# Altium PCB RelayDetect.PcbDoc (part 1 of 2)
Units mm, origin at the board's own origin, x right, y up, seen from the top; angles counter-clockwise.
Board outline 83 x 53 mm, 4 copper layers (Top Layer, Signal, GND, Bottom Layer), stack 0.603 mm thick; 164 components, 110 nets, 604 pads, 228 vias.
Unrouted connection lines stored in the file: 62.
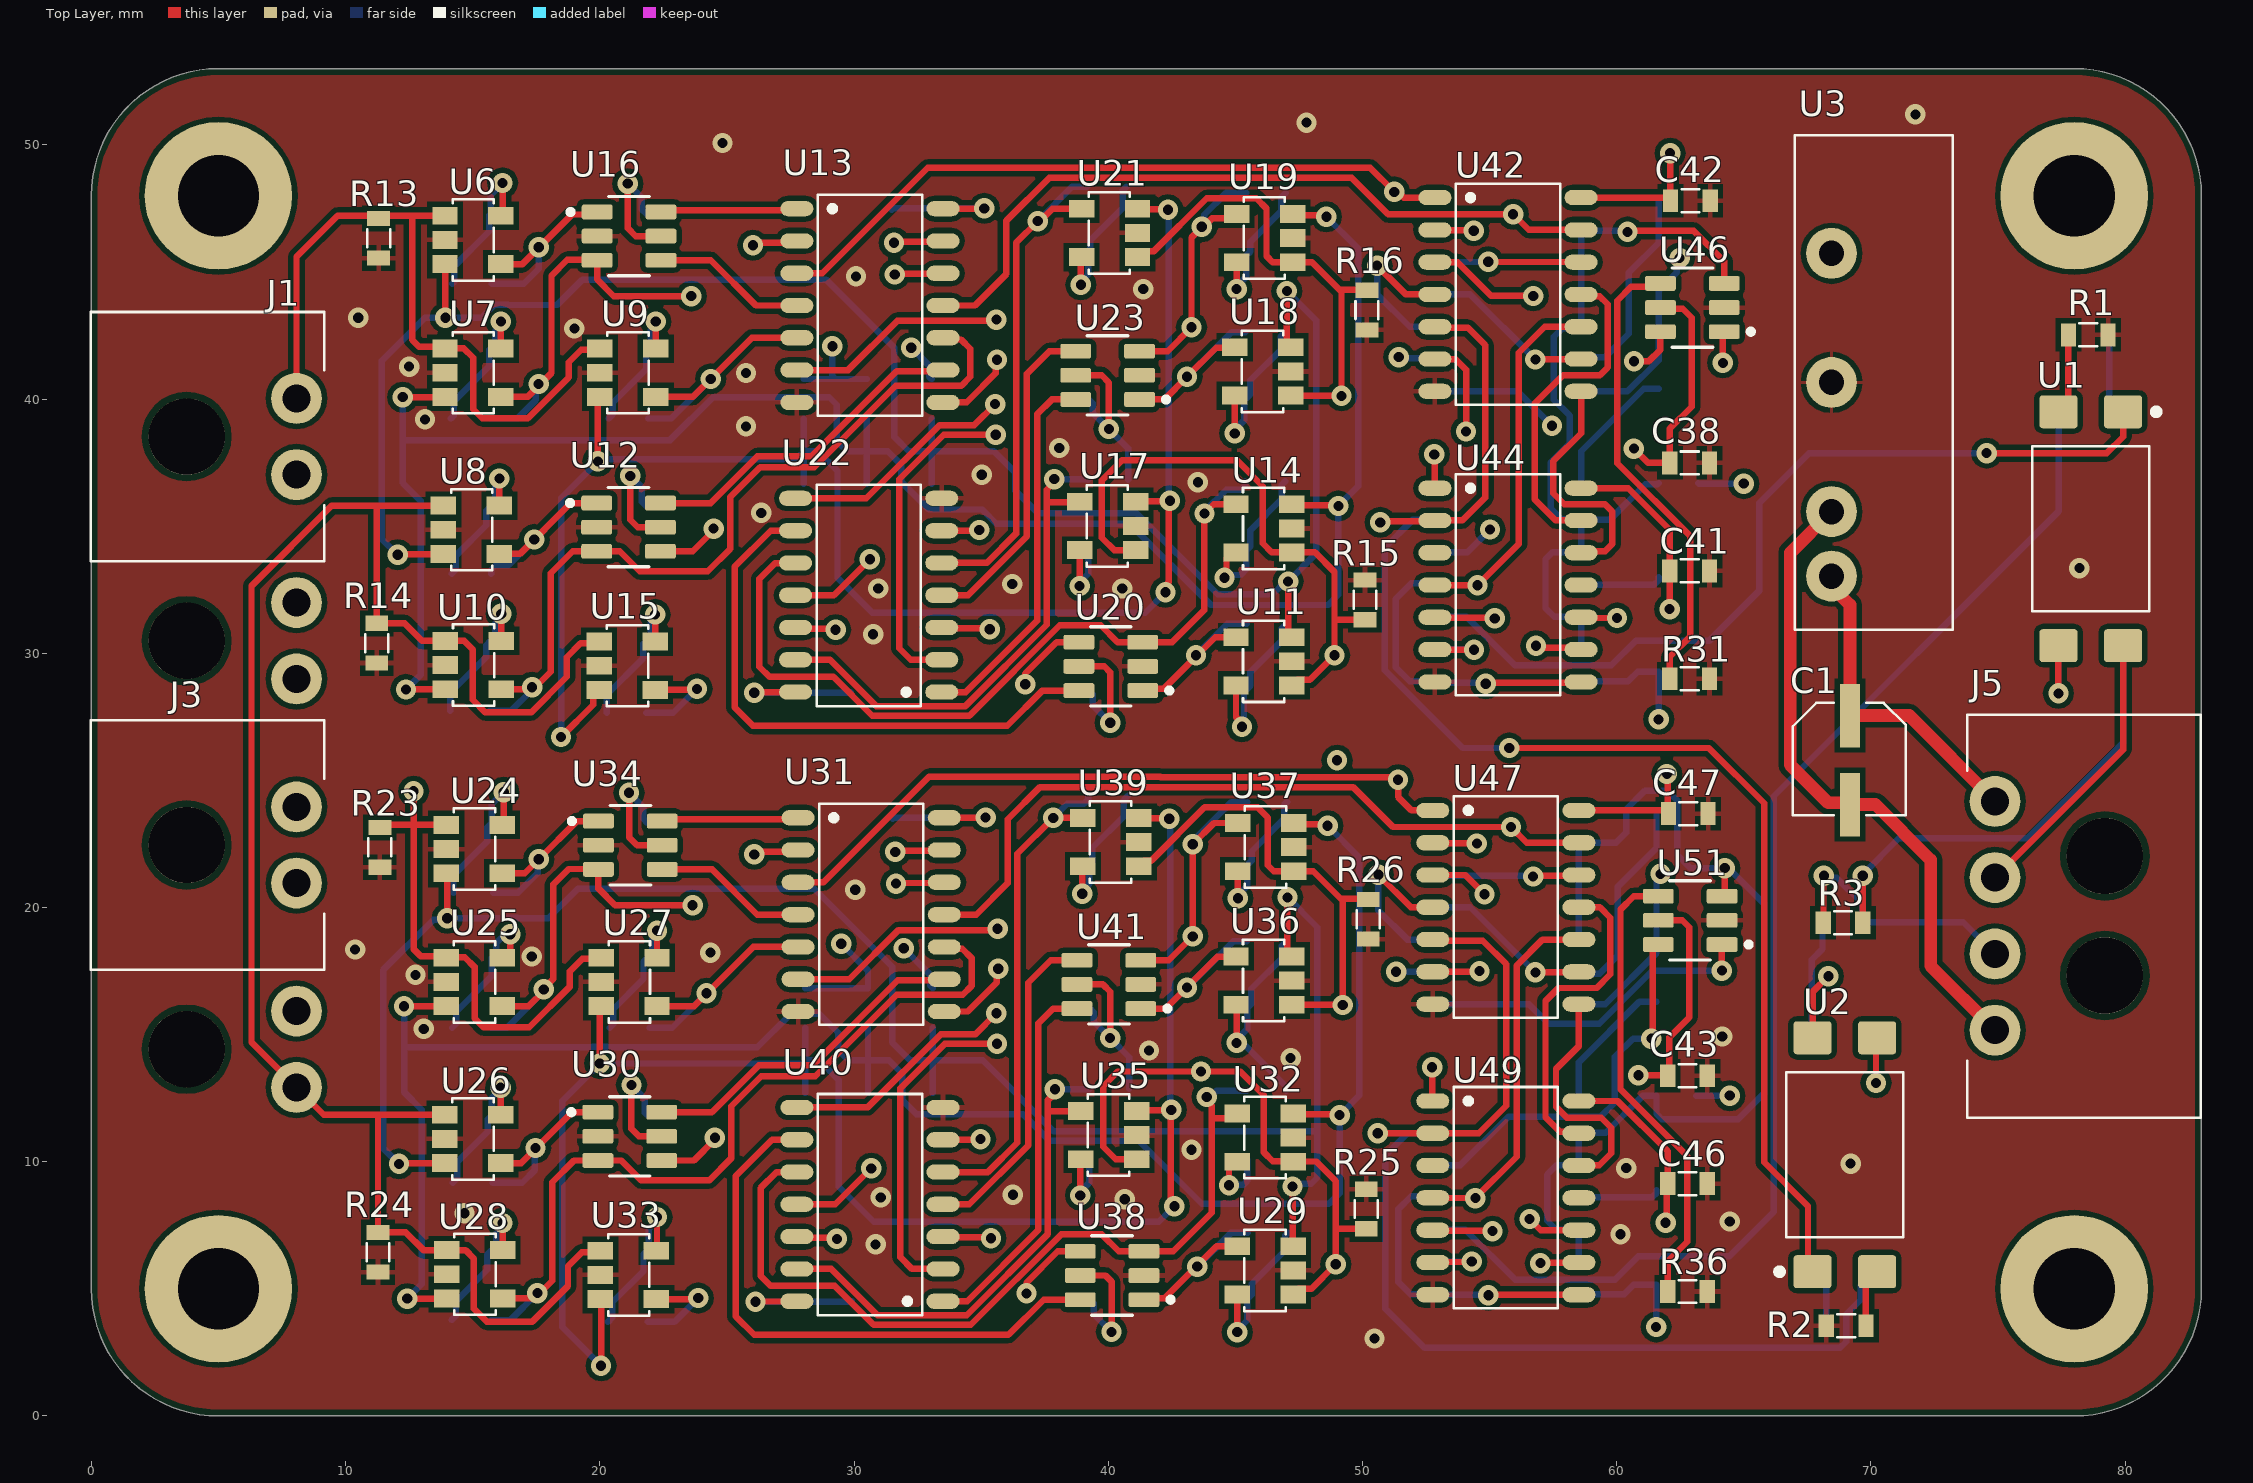
[diagram p0: Top Layer view]
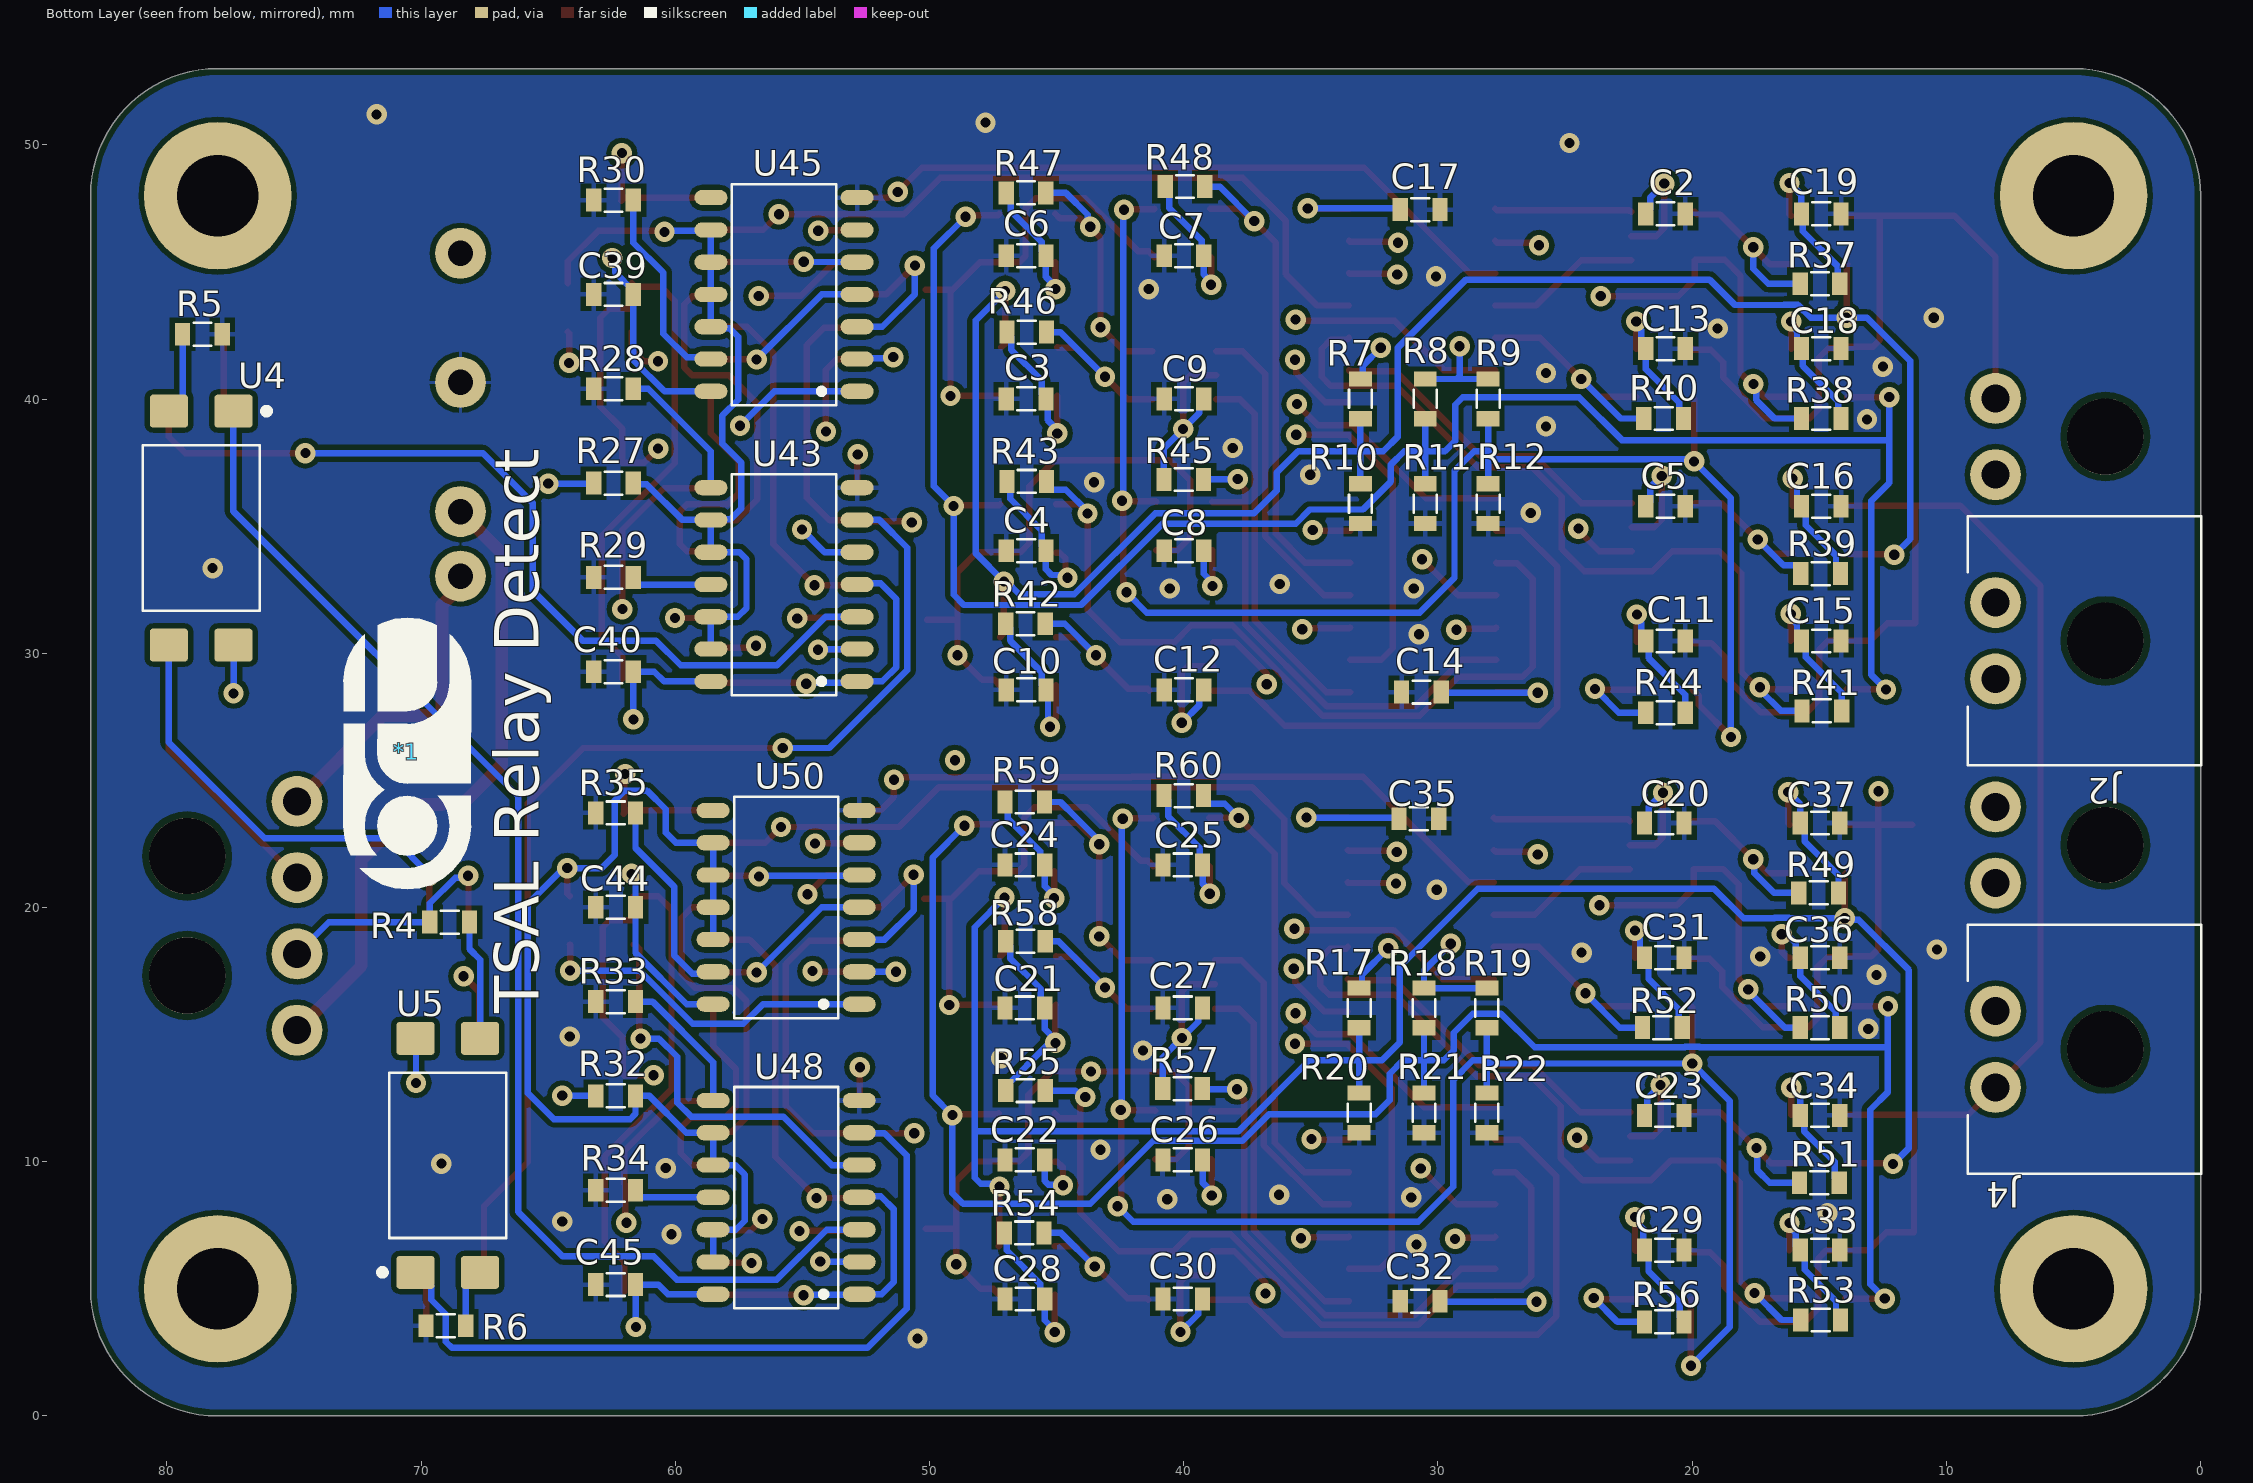
[diagram p1: Bottom Layer view, seen from below]
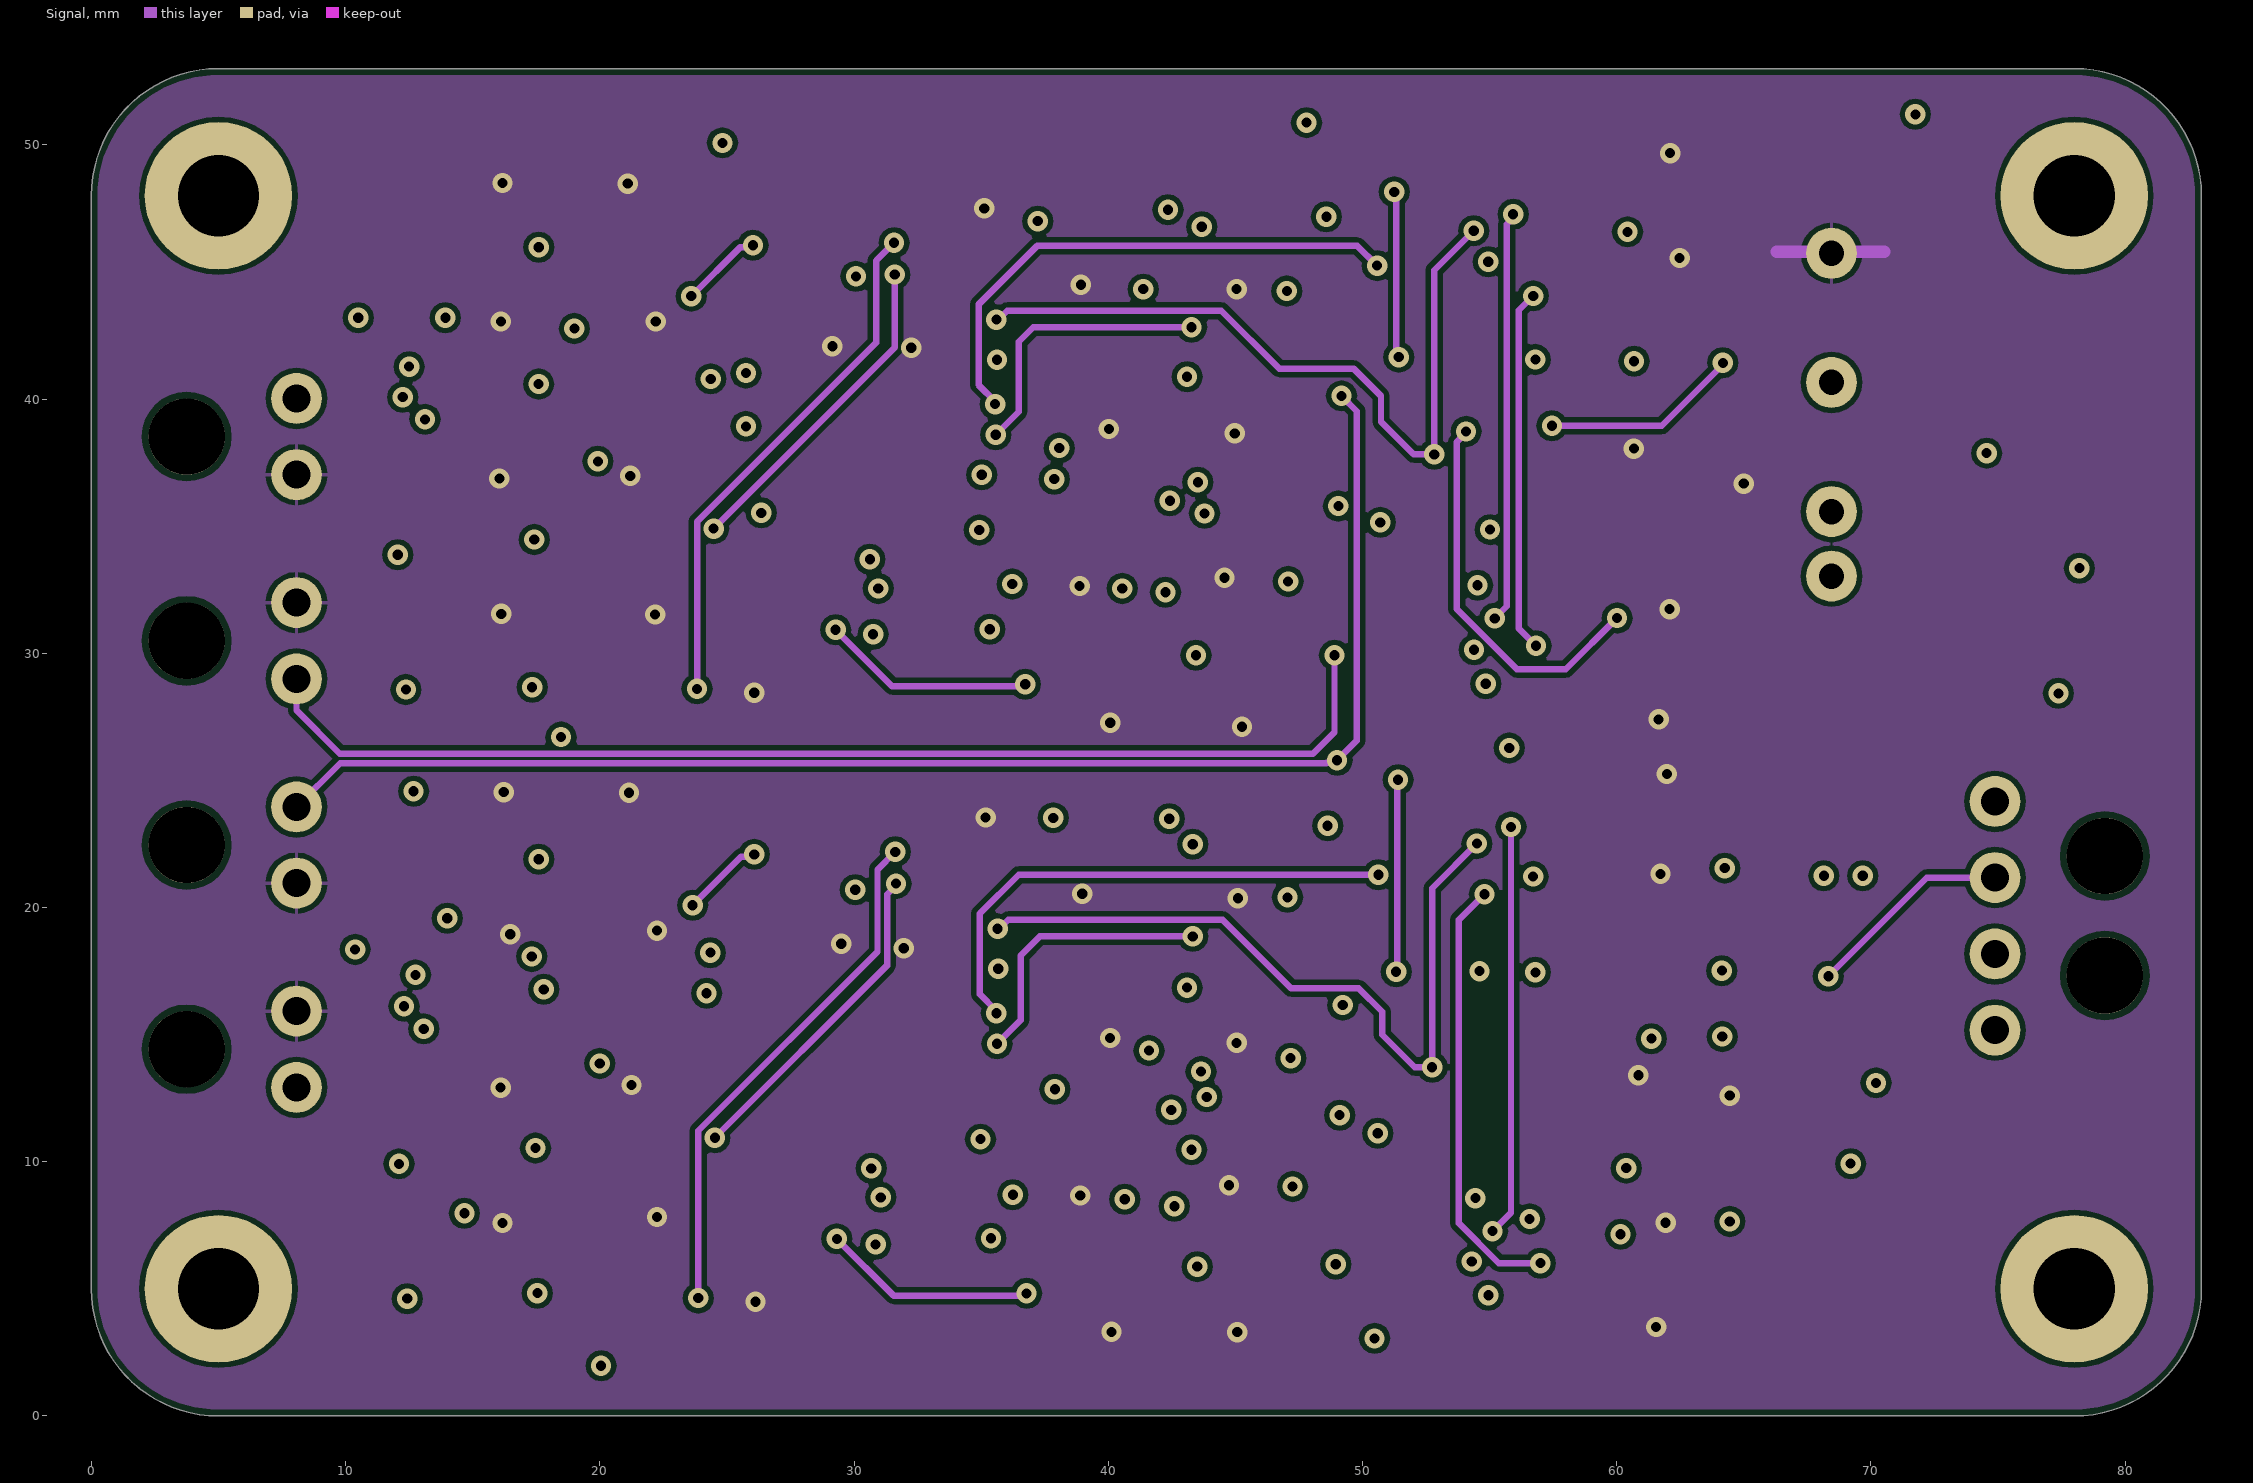
[diagram p2: Signal]
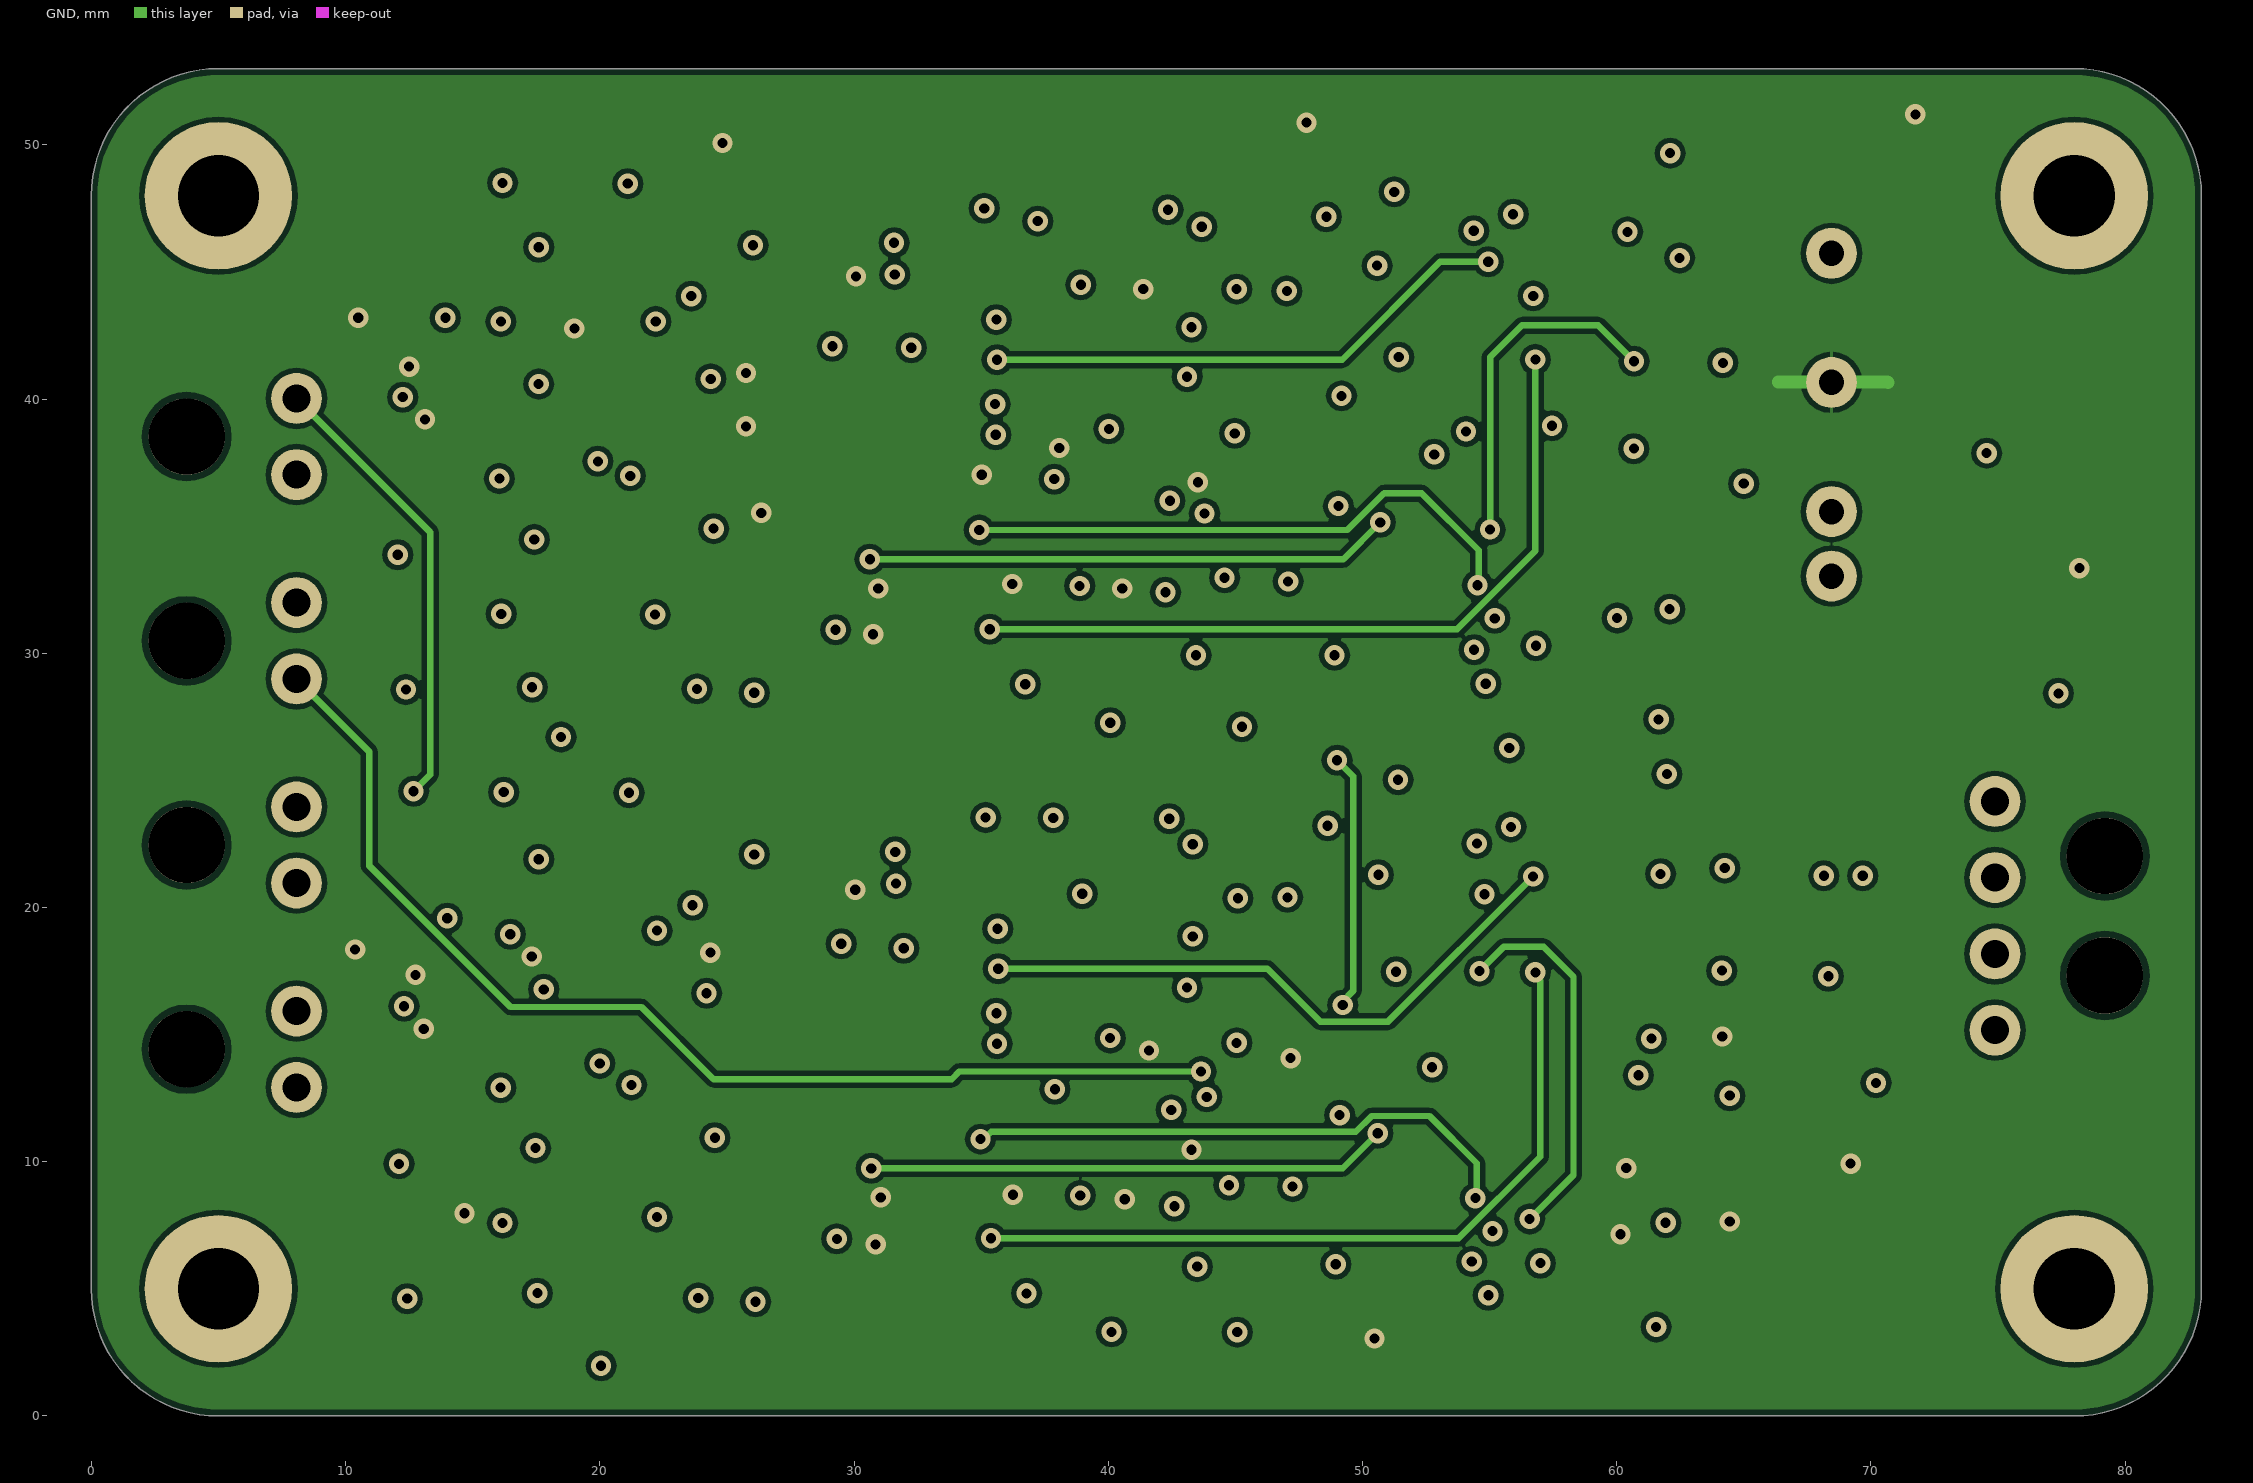
[diagram p3: GND]
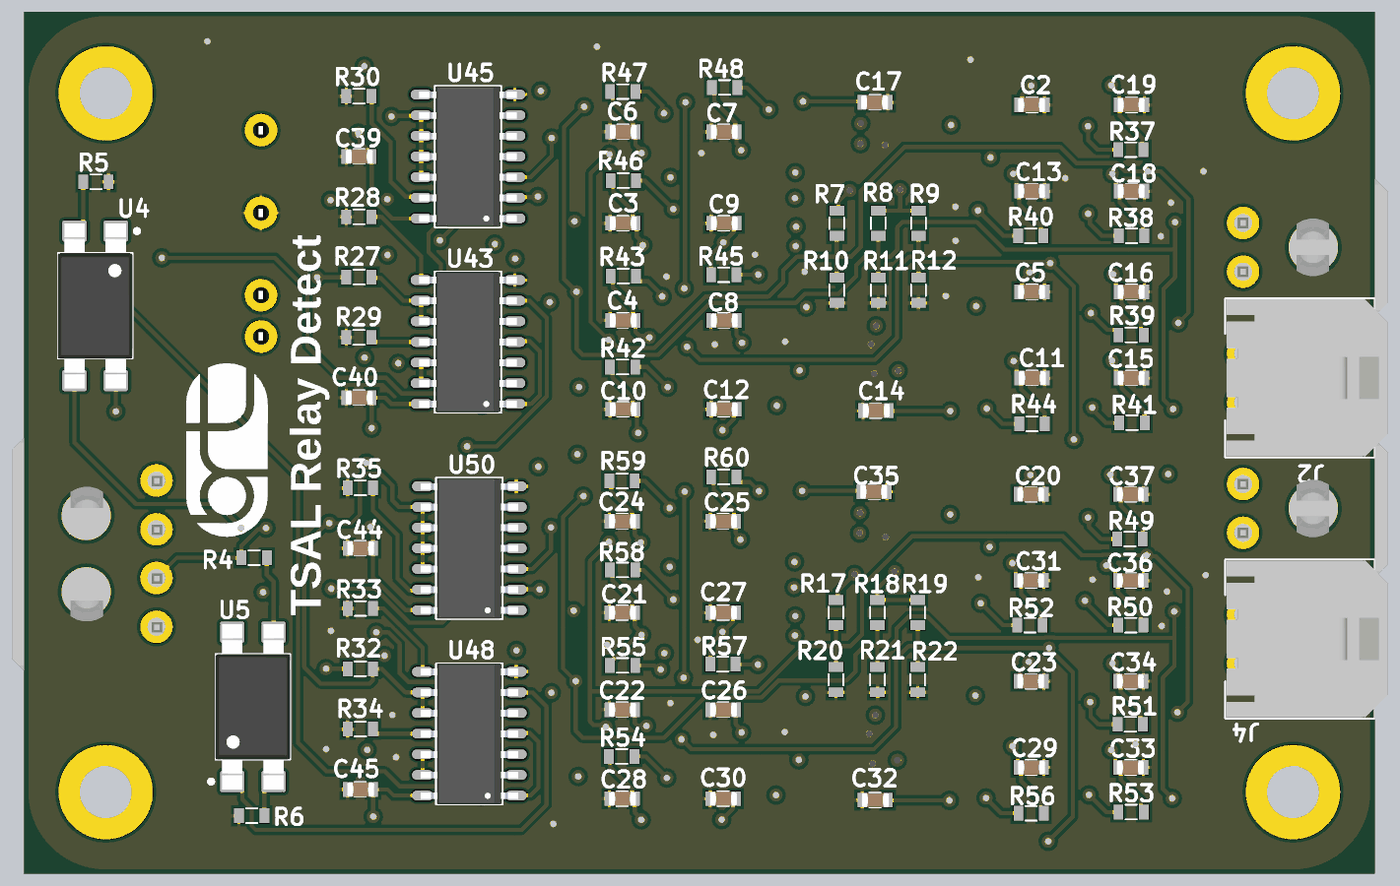
[diagram p5: 3D render of the assembled board from below, using the file's embedded part models]

## Layer stack, top to bottom
Top Solder: solder mask 0.0102, Solder Resist, Dk 3.5
Top Layer: signal copper 0.0356
Dielectric 2: prepreg 0.0711, PP-006, Dk 4.1
Signal: signal copper 0.035
Dielectric 1: dielectric 0.32, FR-4, Dk 4.8
GND: signal copper 0.035
Dielectric 3: prepreg 0.0711, PP-006, Dk 4.1
Bottom Layer: signal copper 0.0356
Bottom Solder: solder mask 0.0102, Solder Resist, Dk 3.5

## Board outline
5,0 cw(c5,5) 0,5 0,48 cw(c5,48) 5,53 78,53 cw(c78,48) 83,48 83,5 cw(c78,5) 78,0

## Design rules (kind name [scope] priority, off if disabled: settings)
AcuteAngle [All] p1: minimum=3.50000000000000E+0001 checktracksonly=FALSE
BoardOutlineClearance "BoardOutlineClearance 1" [All] p1: gap=0.25 ignorepadtopadclearanceinfootprint=FALSE except(0: Arc-SplitContinuation Track-SplitContinuation SMDPad-SplitContinuation THPad-SplitContinuation Via-SplitContinuation Fill-SplitContinuation Poly-SplitContinuation Region-SplitContinuation Text-SplitContinuation) // Milling
Clearance "Clearance-1 1/2 Oz" [All] p1: gap=0.125 ignorepadtopadclearanceinfootprint=FALSE except(0.2: Arc-Fill Arc-Poly Track-Fill Track-Poly SMDPad-SMDPad SMDPad-Fill SMDPad-Poly THPad-Fill THPad-Poly Via-Fill Via-Poly Fill-Fill Fill-Poly Poly-Poly Poly-Region Poly-Text; 0.25: Arc-Hole Track-Hole SMDPad-Hole THPad-Hole Via-Hole Fill-Hole Poly-Hole Region-Hole Text-Hole) // Standart
ComponentClearance [All] p1: gap=0.1 collisioncheckmode=3 verticalgap=0.1 showdistances=FALSE
DiffPairsRouting "DiffPairsRouting 1/2 Oz" [All] p1: maxlimit=0.254 minlimit=0.125 mostfreqgap=0.254 toplayer_minwidth=0.125 toplayer_maxwidth=0.381 toplayer_prefwidth=0.381 midlayer1_minwidth=0.125 midlayer1_maxwidth=0.381 midlayer1_prefwidth=0.381 midlayer2_minwidth=0.125 midlayer2_maxwidth=0.381 midlayer2_prefwidth=0.381 bottomlayer_minwidth=0.125 bottomlayer_maxwidth=0.381 bottomlayer_prefwidth=0.381 maxuncoupledlength=12.7
HoleSize "Minimum HoleSize" [IsPad] p1: absolutevalues=TRUE maxlimit=5.9 minlimit=0.6 maxpercent=80.000 minpercent=20.000
HoleSize "Minimum HoleSize VIA 1" [IsVia] p2: absolutevalues=TRUE maxlimit=5.9 minlimit=0.3 maxpercent=80.000 minpercent=20.000 // Standart
HoleToHoleClearance Hole2HoleClearance [All] p1: gap=0.25 allowstackedmicrovias=FALSE
MinimumAnnularRing "Minimum AR VIA Standart" [All] p1: minimumring=0.15
MinimumAnnularRing "Minimum AR PAD Standart" [All] p2: minimumring=0.2
MinimumSolderMaskSliver "SolderMask Bridge Standart" [All] p1: minsoldermaskwidth=0.15 // All Masks
PlaneClearance "PlaneClearance-1 1/2 Oz" [All] p1: clearance=0.2 // Standart
PlaneConnect "TermalConnect-1 1/2 Oz" [All] p1: planeconnectstyle=Relief reliefexpansion=0.2 reliefentries=4 reliefconductorwidth=0.2 reliefairgap=0.2 // Standart
PolygonConnect "PolygonConnect-1 1/2 Oz" [All] p1: thpad.connectstyle=Relief thpad.reliefconductorwidth=0.15 thpad.reliefentries=4 thpad.polygonreliefangle="90 Angle" thpad.airgapwidth=0.2 smdpad.connectstyle=Relief smdpad.reliefconductorwidth=0.2 smdpad.reliefentries=4 smdpad.polygonreliefangle="90 Angle" smdpad.airgapwidth=0.2 via.connectstyle=Direct via.reliefconductorwidth=0.254 via.reliefentries=4 via.polygonreliefangle="90 Angle" via.airgapwidth=0.254 // Standart
RoomDefinition Detection1 [InComponentClass('Detection1')] p1: confinementstyle=ConfineIn formatcopy=TRUE lockcomponents=FALSE outline 9.625,26.585 51.65,26.585 51.65,50.61 9.625,50.61
RoomDefinition Primary [InComponentClass('Primary')] p2: confinementstyle=ConfineIn formatcopy=TRUE lockcomponents=FALSE outline 51.85,26.955 65.765,26.955 65.765,50.355 51.85,50.355
RoomDefinition Detection2 [InComponentClass('Detection2')] p3: confinementstyle=ConfineIn formatcopy=TRUE lockcomponents=FALSE outline 9.675,2.625 51.7,2.625 51.7,26.65 9.675,26.65
RoomDefinition Secondary [InComponentClass('Secondary')] p4: confinementstyle=ConfineIn formatcopy=TRUE lockcomponents=FALSE outline 51.765,2.85 65.68,2.85 65.68,26.25 51.765,26.25
RoutingCorners [All] p1 off: cornerstyle=45-Degree minsetback=2.54 maxsetback=2.54
RoutingVias [All] p1: holewidth=0.4 width=0.8 viastyle="Through Hole" minholewidth=0.3 minwidth=0.6 maxholewidth=5.9 maxwidth=8.9
SilkToSilkClearance Silk2SilkClearance [All] p1 off: silktosilkclearance=0.15
SilkToSolderMaskClearance Silk2SolderMaskClearance [IsPad] p1 off: minsilkscreentomaskgap=0.15 clearancetoexposedcopper=TRUE
SolderMaskExpansion SolderMaskExpansion-1 [All] p1: expansion=0.05 istentingtop=FALSE // Standart
UnRoutedNet [All] p1: checkbadconnections=TRUE
Width "Width 1/2 Oz" [All] p1: maxlimit=10 minlimit=0.125 preferedwidth=0.254 checkconnectedcopper=TRUE
19 further rules are at their usual default settings.

## Classes and differential pairs
channel class Main: Primary Secondary
channel class DetectionPart: Detection1 Detection2
component class Secondary: C1_Secondary C2_Secondary C3_Secondary C4_Secondary C5_Secondary C43 C44 C45 C46 C47 R1_Secondary R2_Secondary R3_Secondary R4_Secondary R5_Secondary R32 R33 R34 R35 R36 U1_Secondary U2_Secondary U3_Secondary U4_Secondary U5_Secondary U47 U48 U49 U50 U51
component class Primary: C1_Primary C2_Primary C3_Primary C4_Primary C5_Primary C38 C39 C40 C41 C42 R1_Primary R2_Primary R3_Primary R4_Primary R5_Primary R27 R28 R29 R30 R31 U1_Primary U2_Primary U3_Primary U4_Primary U5_Primary U42 U43 U44 U45 U46
component class Detection2: C6_Detection2 C7_Detection2 C8_Detection2 C9_Detection2 C10_Detection2 C11_Detection2 C20 C21 C22 C23 C24 C25 C26 C27 C28 C29 C30 C31 C32 C33 C34 C35 C36 C37 R6_Detection2 R7_Detection2 R8_Detection2 R9_Detection2 R10_Detection2 R11_Detection2 R12_Detection2 R13_Detection2 R14_Detection2 R15_Detection2 R17 R18 R19 R20 R21 R22 R23 R24 R25 R26 R49 R50 R51 R52 R53 R54 R55 R56 R57 R58 R59 R60 U7_Detection2 U8_Detection2 U9_Detection2 U10_Detection2 U11_Detection2 U12_Detection2 U13_Detection2 U14_Detection2 U15_Detection2 U16_Detection2 U17_Detection2 U18_Detection2 U19_Detection2 U20_Detection2 U21_Detection2 U22_Detection2 U23_Detection2 U24 U24_Detection2 U25 U26 U27 U28 U29 U30 U31 U32 U33 U34 U35 U36 U37 U38 U39 U40 U41
component class Detection1: C2 C3 C4 C5 C6 C6_Detection1 C7 C7_Detection1 C8 C8_Detection1 C9 C9_Detection1 C10 C10_Detection1 C11 C11_Detection1 C12 C13 C14 C15 C16 C17 C18 C19 R6_Detection1 R7 R7_Detection1 R8 R8_Detection1 R9 R9_Detection1 R10 R10_Detection1 R11 R11_Detection1 R12 R12_Detection1 R13 R13_Detection1 R14 R14_Detection1 R15 R15_Detection1 R16 R37 R38 R39 R40 R41 R42 R43 R44 R45 R46 R47 R48 U6 U7 U7_Detection1 U8 U8_Detection1 U9 U9_Detection1 U10 U10_Detection1 U11 U11_Detection1 U12 U12_Detection1 U13 U13_Detection1 U14 U14_Detection1 U15 U15_Detection1 U16 U16_Detection1 U17 U17_Detection1 U18 U18_Detection1 U19 U19_Detection1 U20 U20_Detection1 U21 U21_Detection1 U22 U22_Detection1 U23 U23_Detection1 U24_Detection1
component class 1: *1 C1 C10_Detection2 J1 J2 J3 J4 J5 R1 R2 R3 R4 R5 R6 R7_Detection2 R9_Detection2 R15_Detection1 U1 U2 U3 U4 U5 U10_Detection2 U11_Detection2 U12_Detection2 U14_Detection2 U15_Detection2

## Components (designator, comment, footprint, x,y, rotation, side; value= is the part's Value field where it differs from the comment)
*1 "BRT Log" BRT_Log 70.575,26.125 r90 bottom (schematic designator *)
C1 "4.7uF" "Bar Cap 4x5.4" 69.175,24.05 r180 top (schematic designator C12)
C2 "0.1uF" "0603 Capicator" 21.05,47.285 r0 bottom (schematic designator C13)
C3 "0.1uF" "0603 Capicator" 46.2,40.01 r180 bottom (schematic designator C14)
C4 "0.1uF" "0603 Capicator" 46.2,34.035 r180 bottom (schematic designator C15)
C5 "0.1uF" "0603 Capicator" 21.05,35.785 r0 bottom (schematic designator C16)
C6 "0.1uF" "0603 Capicator" 46.2,45.635 r180 bottom (schematic designator C17)
C7 "0.1uF" "0603 Capicator" 39.99,45.635 r180 bottom (schematic designator C18)
C8 "0.1uF" "0603 Capicator" 39.99,34.035 r180 bottom (schematic designator C19)
C9 "0.1uF" "0603 Capicator" 39.99,40.01 r180 bottom (schematic designator C20)
C10 "0.1uF" "0603 Capicator" 46.2,28.56 r180 bottom (schematic designator C21)
C11 "0.1uF" "0603 Capicator" 21.05,30.485 r180 bottom (schematic designator C6)
C12 "0.1uF" "0603 Capicator" 39.99,28.56 r180 bottom (schematic designator C22)
C13 "0.1uF" "0603 Capicator" 21.05,41.985 r0 bottom (schematic designator C7)
C14 "0.1uF" "0603 Capicator" 30.65,28.475 r180 bottom (schematic designator C23)
C15 "0.1uF" "0603 Capicator" 14.925,30.485 r0 bottom (schematic designator C8)
C16 "0.1uF" "0603 Capicator" 14.925,35.785 r0 bottom (schematic designator C9)
C17 "0.1uF" "0603 Capicator" 30.7,47.45 r0 bottom (schematic designator C24)
C18 "0.1uF" "0603 Capicator" 14.925,41.985 r0 bottom (schematic designator C10)
C19 "0.1uF" "0603 Capicator" 14.925,47.285 r0 bottom (schematic designator C11)
C20 "0.1uF" "0603 Capicator" 21.1,23.325 r0 bottom (schematic designator C13)
C21 "0.1uF" "0603 Capicator" 46.25,16.05 r180 bottom (schematic designator C14)
C22 "0.1uF" "0603 Capicator" 46.25,10.075 r180 bottom (schematic designator C15)
C23 "0.1uF" "0603 Capicator" 21.1,11.825 r0 bottom (schematic designator C16)
C24 "0.1uF" "0603 Capicator" 46.25,21.675 r180 bottom (schematic designator C17)
C25 "0.1uF" "0603 Capicator" 40.04,21.675 r180 bottom (schematic designator C18)
C26 "0.1uF" "0603 Capicator" 40.04,10.075 r180 bottom (schematic designator C19)
C27 "0.1uF" "0603 Capicator" 40.04,16.05 r180 bottom (schematic designator C20)
C28 "0.1uF" "0603 Capicator" 46.25,4.6 r180 bottom (schematic designator C21)
C29 "0.1uF" "0603 Capicator" 21.1,6.525 r180 bottom (schematic designator C6)
C30 "0.1uF" "0603 Capicator" 40.04,4.6 r180 bottom (schematic designator C22)
C31 "0.1uF" "0603 Capicator" 21.1,18.025 r0 bottom (schematic designator C7)
C32 "0.1uF" "0603 Capicator" 30.7,4.515 r180 bottom (schematic designator C23)
C33 "0.1uF" "0603 Capicator" 14.975,6.525 r0 bottom (schematic designator C8)
C34 "0.1uF" "0603 Capicator" 14.975,11.825 r0 bottom (schematic designator C9)
C35 "0.1uF" "0603 Capicator" 30.75,23.49 r0 bottom (schematic designator C24)
C36 "0.1uF" "0603 Capicator" 14.975,18.025 r0 bottom (schematic designator C10)
C37 "0.1uF" "0603 Capicator" 14.975,23.325 r0 bottom (schematic designator C11)
C38 "0.1uF" "0603 Capicator" 62.87,37.488 r180 top (schematic designator C1)
C39 "0.1uF" "0603 Capicator" 62.43,44.115 r180 bottom (schematic designator C2)
C40 "0.1uF" "0603 Capicator" 62.43,29.275 r180 bottom (schematic designator C3)
C41 "0.1uF" "0603 Capicator" 62.87,33.244 r180 top (schematic designator C4)
C42 "0.1uF" "0603 Capicator" 62.9,47.8 r180 top (schematic designator C5)
C43 "0.1uF" "0603 Capicator" 62.785,13.383 r180 top (schematic designator C1)
C44 "0.1uF" "0603 Capicator" 62.345,20.01 r180 bottom (schematic designator C2)
C45 "0.1uF" "0603 Capicator" 62.345,5.17 r180 bottom (schematic designator C3)
C46 "0.1uF" "0603 Capicator" 62.785,9.139 r180 top (schematic designator C4)
C47 "0.1uF" "0603 Capicator" 62.815,23.695 r180 top (schematic designator C5)
J1 "MicroFit 2x1" "MolexMicroFit 2x1" 8.07,40.025 r270 top
J2 "MicroFit 2x1" "MolexMicroFit 2x1" 8.07,28.992 r90 bottom
J3 "MicroFit 2x1" "MolexMicroFit 2x1" 8.07,23.958 r270 top
J4 "MicroFit 2x1" "MolexMicroFit 2x1" 8.07,12.925 r90 bottom
J5 "MicroFit 4x1" "MolexMicroFit 4x1" 74.88,24.175 r90 top
R1 "1k" "0603 Resistor" 78.55,42.525 r180 top (schematic designator R16)
R2 "1k" "0603 Resistor" 69.025,3.55 r0 top (schematic designator R17)
R3 "1k" "0603 Resistor" 68.9,19.4 r0 top (schematic designator R18)
R4 "1k" "0603 Resistor" 68.875,19.425 r180 bottom (schematic designator R19)
R5 "1k" "0603 Resistor" 78.6,42.55 r0 bottom (schematic designator R20)
R6 "1k" "0603 Resistor" 69.025,3.55 r180 bottom (schematic designator R21)
R7 "1k" "0603 Resistor" 33.05,40.01 r90 bottom (schematic designator R6)
R8 "1k" "0603 Resistor" 30.5,40.01 r90 bottom (schematic designator R7)
R9 "1k" "0603 Resistor" 28.025,40.01 r90 bottom (schematic designator R8)
R10 "4.7k" "0603 Resistor" 33.05,35.885 r90 bottom (schematic designator R9)
R11 "4.7k" "0603 Resistor" 30.5,35.885 r90 bottom (schematic designator R10)
R12 "4.7k" "0603 Resistor" 28.025,35.885 r90 bottom (schematic designator R11)
R13 "1k" "0603 Resistor" 11.3,46.325 r90 top (schematic designator R12)
R14 "1k" "0603 Resistor" 11.225,30.4 r90 top (schematic designator R13)
R15 "1k" "0603 Resistor" 50.1,32.1 r270 top (schematic designator R14)
R16 "1k" "0603 Resistor" 50.175,43.5 r90 top (schematic designator R15)
R17 "1k" "0603 Resistor" 33.1,16.05 r90 bottom (schematic designator R6)
R18 "1k" "0603 Resistor" 30.55,16.05 r90 bottom (schematic designator R7)
R19 "1k" "0603 Resistor" 28.075,16.05 r90 bottom (schematic designator R8)
R20 "4.7k" "0603 Resistor" 33.1,11.925 r90 bottom (schematic designator R9)
R21 "4.7k" "0603 Resistor" 30.55,11.925 r90 bottom (schematic designator R10)
R22 "4.7k" "0603 Resistor" 28.075,11.925 r90 bottom (schematic designator R11)
R23 "1k" "0603 Resistor" 11.35,22.365 r90 top (schematic designator R12)
R24 "1k" "0603 Resistor" 11.275,6.44 r90 top (schematic designator R13)
R25 "1k" "0603 Resistor" 50.15,8.14 r270 top (schematic designator R14)
R26 "1k" "0603 Resistor" 50.225,19.54 r90 top (schematic designator R15)
R27 "10k" "0603 Resistor" 62.43,36.695 r0 bottom (schematic designator R1)
R28 "10k" "0603 Resistor" 62.43,40.405 r180 bottom (schematic designator R2)
R29 "10k" "0603 Resistor" 62.43,32.985 r180 bottom (schematic designator R3)
R30 "10k" "0603 Resistor" 62.43,47.825 r180 bottom (schematic designator R4)
R31 "10k" "0603 Resistor" 62.87,29 r180 top (schematic designator R5)
R32 "10k" "0603 Resistor" 62.345,12.59 r0 bottom (schematic designator R1)
R33 "10k" "0603 Resistor" 62.345,16.3 r180 bottom (schematic designator R2)
R34 "10k" "0603 Resistor" 62.345,8.88 r180 bottom (schematic designator R3)
R35 "10k" "0603 Resistor" 62.345,23.72 r180 bottom (schematic designator R4)
R36 "10k" "0603 Resistor" 62.785,4.895 r180 top (schematic designator R5)
R37 "3k" "0603 Resistor" 14.975,44.535 r180 bottom (schematic designator R22)
R38 "3k" "0603 Resistor" 14.925,39.235 r180 bottom (schematic designator R23)
R39 "3k" "0603 Resistor" 14.95,33.135 r180 bottom (schematic designator R24)
R40 "3k" "0603 Resistor" 21.125,39.235 r180 bottom (schematic designator R25)
R41 "3k" "0603 Resistor" 14.9,27.735 r180 bottom (schematic designator R26)
R42 "3k" "0603 Resistor" 46.225,31.16 r0 bottom (schematic designator R27)
R43 "3k" "0603 Resistor" 46.175,36.76 r0 bottom (schematic designator R28)
R44 "3k" "0603 Resistor" 21.05,27.66 r180 bottom (schematic designator R29)
R45 "3k" "0603 Resistor" 40,36.835 r0 bottom (schematic designator R30)
R46 "3k" "0603 Resistor" 46.175,42.635 r0 bottom (schematic designator R31)
R47 "3k" "0603 Resistor" 46.205,48.11 r0 bottom (schematic designator R32)
R48 "3k" "0603 Resistor" 39.95,48.36 r0 bottom (schematic designator R33)
R49 "3k" "0603 Resistor" 15.025,20.575 r180 bottom (schematic designator R22)
R50 "3k" "0603 Resistor" 14.975,15.275 r180 bottom (schematic designator R23)
R51 "3k" "0603 Resistor" 15,9.175 r180 bottom (schematic designator R24)
R52 "3k" "0603 Resistor" 21.175,15.275 r180 bottom (schematic designator R25)
R53 "3k" "0603 Resistor" 14.95,3.775 r180 bottom (schematic designator R26)
R54 "3k" "0603 Resistor" 46.275,7.2 r0 bottom (schematic designator R27)
R55 "3k" "0603 Resistor" 46.225,12.8 r0 bottom (schematic designator R28)
R56 "3k" "0603 Resistor" 21.1,3.7 r180 bottom (schematic designator R29)
R57 "3k" "0603 Resistor" 40.05,12.875 r0 bottom (schematic designator R30)
R58 "3k" "0603 Resistor" 46.225,18.675 r0 bottom (schematic designator R31)
R59 "3k" "0603 Resistor" 46.255,24.15 r0 bottom (schematic designator R32)
R60 "3k" "0603 Resistor" 40,24.4 r0 bottom (schematic designator R33)
U1 "Opt" FAIR-MDIP-4_V 78.65,34.9 r270 top (schematic designator U25)
U2 "Opt" FAIR-MDIP-4_V 68.975,10.275 r90 top (schematic designator U26)
U3 "DC/DC" SIP7 68.45,33.035 r180 top (schematic designator U27)
U4 "Opt" FAIR-MDIP-4_V 78.65,34.925 r270 bottom (schematic designator U28)
U5 "Opt" FAIR-MDIP-4_V 68.95,10.25 r90 bottom (schematic designator U29)
U6 "Comp" SOT-23-5 13.91,46.26 r270 top (schematic designator U7)
U7 "Comp" SOT-23-5 13.91,41.035 r270 top (schematic designator U10)
U8 "Comp" SOT-23-5 13.85,34.86 r270 top (schematic designator U11)
U9 "Comp" SOT-23-5 20,41.035 r270 top (schematic designator U12)
U10 "Comp" SOT-23-5 13.925,29.535 r270 top (schematic designator U14)
U11 "Comp" SOT-23-5 47.225,29.685 r90 top (schematic designator U15)
U12 "Inv" SOT236 21.13,34.96 r0 top (schematic designator U13)
U13 "2AND" SOIC-14 27.75,47.49 r270 top (schematic designator U9)
U14 "Comp" SOT-23-5 47.225,34.91 r90 top (schematic designator U18)
U15 "Comp" SOT-23-5 19.975,29.51 r270 top (schematic designator U19)
U16 "Inv" SOT236 21.15,46.41 r0 top (schematic designator U8)
U17 "Comp" SOT-23-5 41.075,35.01 r90 top (schematic designator U20)
U18 "Comp" SOT-23-5 47.175,41.085 r90 top (schematic designator U21)
U19 "Comp" SOT-23-5 47.25,46.335 r90 top (schematic designator U23)
U20 "Inv" SOT236 40.1,29.485 r180 top (schematic designator U16)
U21 "Comp" SOT-23-5 41.15,46.535 r90 top (schematic designator U24)
U22 "2AND" SOIC-14 33.45,28.475 r90 top (schematic designator U17)
U23 "Inv" SOT236 39.975,40.935 r180 top (schematic designator U22)
U24 "Comp" SOT-23-5 13.96,22.3 r270 top (schematic designator U7)
U25 "Comp" SOT-23-5 13.96,17.075 r270 top (schematic designator U10)
U26 "Comp" SOT-23-5 13.9,10.9 r270 top (schematic designator U11)
U27 "Comp" SOT-23-5 20.05,17.075 r270 top (schematic designator U12)
U28 "Comp" SOT-23-5 13.975,5.575 r270 top (schematic designator U14)
U29 "Comp" SOT-23-5 47.275,5.725 r90 top (schematic designator U15)
U30 "Inv" SOT236 21.18,11 r0 top (schematic designator U13)
U31 "2AND" SOIC-14 27.8,23.53 r270 top (schematic designator U9)
U32 "Comp" SOT-23-5 47.275,10.95 r90 top (schematic designator U18)
U33 "Comp" SOT-23-5 20.025,5.55 r270 top (schematic designator U19)
U34 "Inv" SOT236 21.2,22.45 r0 top (schematic designator U8)
U35 "Comp" SOT-23-5 41.125,11.05 r90 top (schematic designator U20)
U36 "Comp" SOT-23-5 47.225,17.125 r90 top (schematic designator U21)
U37 "Comp" SOT-23-5 47.3,22.375 r90 top (schematic designator U23)
U38 "Inv" SOT236 40.15,5.525 r180 top (schematic designator U16)
U39 "Comp" SOT-23-5 41.2,22.575 r90 top (schematic designator U24)
U40 "2AND" SOIC-14 33.5,4.515 r90 top (schematic designator U17)
U41 "Inv" SOT236 40.025,16.975 r180 top (schematic designator U22)
U42 "2XOR" SOIC-14 52.85,47.925 r270 top (schematic designator U1)
U43 "2AND" SOIC-14 52.85,28.895 r90 bottom (schematic designator U2)
U44 "4AND" SOIC-14 52.85,36.495 r270 top (schematic designator U3)
U45 "4NOR" SOIC-14 52.85,40.305 r90 bottom (schematic designator U4)
U46 "Inv" SOT236 62.975,43.6 r180 top (schematic designator U5)
U47 "2XOR" SOIC-14 52.765,23.82 r270 top (schematic designator U1)
U48 "2AND" SOIC-14 52.765,4.79 r90 bottom (schematic designator U2)
U49 "4AND" SOIC-14 52.765,12.39 r270 top (schematic designator U3)
U50 "4NOR" SOIC-14 52.765,16.2 r90 bottom (schematic designator U4)
U51 "Inv" SOT236 62.89,19.495 r180 top (schematic designator U5)

## Footprints (in the part's own frame and the unit in brackets; to place one, negate y for a bottom-side part, rotate by r counter-clockwise, add the part's x,y. Pads: shape width x height; smd on the part's side, far side on the other; paste and mask are expansions set on the pad)
"0603 Capicator" [mm]
  rect 0.6x0.9 smd: 1(-0.78,0) 2(0.78,0)
  silkscreen extent -0.35,-0.45 0.35,0.45, body extent -0.82,-0.45 0.88,0.45, height 0.9
"0603 Resistor" [mm]
  rect 0.6x0.9 smd: 1(-0.78,0) 2(0.78,0)
  silkscreen extent -0.35,-0.45 0.35,0.45, body extent -0.85,-0.45 0.85,0.45, height 0.55
"Bar Cap 4x5.4" [mm]
  rect 0.8x2.5 smd: 1(0,0) 2(0,-3.5)
  silkscreen extent -2.2,-4 2.25,0.43, body extent -2.15,-4.3 2.15,0.7, height 5.4
BRT_Log [mm]
  silkscreen extent -5.42,-2.54 5.27,2.48
FAIR-MDIP-4_V [mm]
  rrect20% 1.3x1.5 smd: 1(-4.6,1.27) 2(-4.6,-1.27) 3(4.6,-1.27) 4(4.6,1.27)
  silkscreen extent -4.72,-2.3 3.25,2.7, body extent -5.08,-2.3 5.08,2.3, height 3.85
"MolexMicroFit 2x1" [mm]
  round 2 hole 1.1: 1(3,0) 2(0,0)
  round 3 hole 3: A(1.5,-4.32)
  silkscreen extent -3.4,-8.1 6.4,1.1, body extent -3.33,-8.9 6.33,1, height 5.64
"MolexMicroFit 4x1" [mm]
  round 2 hole 1.1: 1(0,0) 2(-3,0) 3(-6,0) 4(-9,0)
  round 3 hole 3: A(-6.85,-4.32) A(-2.15,-4.32)
  silkscreen extent -12.45,-8.1 3.4,1.1, body extent -12.35,-8.87 3.3,1.03, height 5.64
SIP7 [mm]
  round 2 hole 1: 1(0,0) 2(0,-2.54) 4(0,-7.62) 6(0,-12.7)
  silkscreen extent -4.77,-17.35 1.45,2.1, body extent -4.7,-17.27 1.39,2.03, height 10.16
SOIC-14 [mm]
  oval 0.6x1.3 smd paste+0 mask+0.1: 1(0,0) 2(1.27,0) 3(2.54,0) 4(3.81,0) 5(5.08,0) 6(6.35,0) 7(7.62,0) 8(7.62,5.75) 9(6.35,5.75) 10(5.08,5.75) 11(3.81,5.75) 12(2.54,5.75) 13(1.27,5.75) 14(0,5.75)
  silkscreen extent -0.55,0.82 8.15,4.92, body extent -0.52,-0.12 8.13,5.87, height 1.75
SOT236 [mm]
  rrect25% 1.21x0.58 smd: 1(-1.255,0.95) 2(-1.255,0) 3(-1.255,-0.95) 4(1.255,-0.95) 5(1.255,0) 6(1.255,0.95)
  silkscreen extent -2.4,-1.56 0.8,1.56, body extent -1.4,-1.45 1.4,1.45, height 1.45
SOT-23-5 [mm]
  rect 0.7x1 smd mask+0.045: 1(-0.95,0) 2(0,0) 3(0.95,0) 4(0.95,2.2) 5(-0.95,2.2)
  silkscreen extent -1.6,0.3 1.6,1.92, body extent -1.5,-0.15 1.5,2.35, height 1.1

## Part data
*1: "Team Logo"
C1: library part "Cap Pol 4.7uF", "ECAP SMD,  35V, 105°C", Manufacturer=Epcos, Part Number=B41121A7475M000, ComponentLink1Description=Chip&Dip, ComponentLink1URL=https://www.chipdip.ru/product/b41121a7475m000, Type=Capacitor
C2 C3 C4 C5 C6 C7 C8 C9 C10 C11 C12 C13 C14 C15 C16 C17 C18 C19 C20 C21 C22 C23 C24 C25 C26 C27 C28 C29 C30 C31 C32 C33 C34 C35 C36 C37 C38 C39 C40 C41 C42 C43 C44 C45 C46 C47: library part "Cap 0.1uF (0603)", "0.1uF X7R 16V 10% 0603", Manufacturer="Murata Manufacturing", Part Number=GRM188R71C104KA01D, ComponentLink1Description=Chip&Dip, ComponentLink1URL=https://www.chipdip.ru/product/grm188r71c104ka01d, Type=Capacitor
J1 J2 J3 J4: library part "Conn 2 [MicroFit]", "Micro-Fit 3.0 Right-Angle Header, 3.00mm Pitch, Single Row, 2 Circuits, with Snap-in Plastic Peg PCB Lock, Tin, Glow-Wire Capable, Black", Manufacturer=Molex, Part Number=436500200, ComponentLink1Description=Molex, ComponentLink1URL=https://www.molex.com/molex/products/part-detail/pcb_headers/0436500200, Type=Connector
J5: library part "Conn 4 [MicroFit]", "Micro-Fit 3.0 Right-Angle Header, 3.00mm Pitch, Single Row, 4 Circuits, with Snap-in Plastic Peg PCB Lock, Tin, Glow-Wire Capable, Black", Manufacturer=Molex, Part Number=436500400, ComponentLink1Description=Molex, ComponentLink1URL=https://www.molex.com/molex/products/part-detail/pcb_headers/0436500400, Type=Connector
R1 R2 R3 R4 R5 R6 R7 R8 R9 R13 R14 R15 R16 R17 R18 R19 R23 R24 R25 R26: library part "Res 1k (0603)", "0.1W 0603 1k, 1%", Manufacturer=Taiwan, Part Number=RC0603FR-071KL, ComponentLink1Description=Chip&Dip, ComponentLink1URL=https://www.chipdip.ru/product0/9000079676, Type=Resistor
R10 R11 R12 R20 R21 R22: library part "Res 4.7k (0603)", "0.1W 0603 4.7k, 1%", Manufacturer=Taiwan, Part Number=RC0603FR-074K7L, ComponentLink1Description=Chip&Dip, ComponentLink1URL=https://www.chipdip.ru/product0/9000079728, Type=Resistor
R27 R28 R29 R30 R31 R32 R33 R34 R35 R36: library part "Res 10k (0603)", "0.1W 0603 10k, 1%", Manufacturer=Taiwan, Part Number=RC0603FR-0710KL, ComponentLink1Description=Chip&Dip, ComponentLink1URL=https://www.chipdip.ru/product0/9000079736, Type=Resistor
R37 R38 R39 R40 R41 R42 R43 R44 R45 R46 R47 R48 R49 R50 R51 R52 R53 R54 R55 R56 R57 R58 R59 R60: library part "Res 3k (0603)", "0.1W 0603 3k, 1%", Manufacturer=Taiwan, Part Number=RC0603FR-073KL, ComponentLink1Description=Chip&Dip, ComponentLink1URL=https://www.chipdip.ru/product0/9000079723, Type=Resistor
U1 U2 U4 U5: library part "Optocoupler [FOD817B]", "Phototransistor Optocoupler, 4 us Rise, 3 us Fall, 5000 Vrms, -55 to 110 degC, 4-Pin MDIP, RoHS, Tape and Reel", Manufacturer="ON Semiconductor", Part Nomber=FOD817B, ComponentLink1Description=Chip&Dip, ComponentLink1URL=https://www.chipdip.ru/product/fod817b, ComponentLink2Description=DataSheet, ComponentLink2URL=https://static.chipdip.ru/lib/297/DOC000297284.pdf
U3: library part "DC/DC Isolated 12V [TMH]", "The TMH series are ultra miniature, isolated 2 Watt DC/DC-converters in a Single-in-Line  package  (SIP)", Input Voltage=24, Manufacturer="Traco Power", Output Voltage=12, Part Number=TMH2412S, ComponentLink1Description=Chip&Dip, ComponentLink1URL=https://www.chipdip.ru/product/tmv2412s, ComponentLink2Description=DataSheet, ComponentLink2URL=https://static.chipdip.ru/lib/005/DOC001005854.pdf, Type=IC
U6 U7 U8 U9 U10 U11 U14 U15 U17 U18 U19 U21 U24 U25 U26 U27 U28 U29 U32 U33 U35 U36 U37 U39: library part "Comparator [LMV]", "Differential comparator with strobes", Manufacturer="Texas Instruments", Part Number=LMV331M5/NOPB, ComponentLink1Description=DataSheet, ComponentLink1URL=https://static.chipdip.ru/lib/291/DOC000291302.pdf, ComponentLink2Description=Chip&Dip, ComponentLink2URL=https://www.chipdip.ru/product/lmv331m5-nopb, Type=IC
U12 U16 U20 U23 U30 U34 U38 U41 U46 U51: library part "Inverter (SN74)", "Dual inverter, 1.65-5.5V", Manufacturer="Texas Instruments", Part Number=SN74LVC2G04DBVR, ComponentLink1Description=Chip&Dip, ComponentLink1URL=https://www.chipdip.ru/product/sn74lvc2g04dbvr-2, ComponentLink2Description=DataSheet, ComponentLink2URL=https://static.chipdip.ru/lib/021/DOC001021810.pdf, Type=IC
U13 U22 U31 U40 U43 U48: library part 2And, "4 logic elements \"2AND\"", Manufacturer="Texas Instruments", Part Number=SN74AC08DR, ComponentLink1Description=DataSheet, ComponentLink1URL=https://static.chipdip.ru/lib/551/DOC001551527.pdf, ComponentLink2Description=Chip&Dip, ComponentLink2URL=https://www.chipdip.ru/product/sn74ac08dr, Type=IC
U42 U47: library part 4(2XOR), "4 logic elements \"2XOR\"", Manufacturer=Nexperia, Part Number=74HC86D,653, ComponentLink1Description=Chip&Dip, ComponentLink1URL=https://www.chipdip.ru/product/74hc86d, ComponentLink2Description=DataSheet, ComponentLink2URL=https://ru.mouser.com/datasheet/2/916/74HC_HCT86-1319799.pdf, Type=IC
U44 U49: library part 2(4AND), "2 logic elements \"4AND\"", Manufacturer=Nexperia, Part Number=74HC21D,653, ComponentLink1Description=Chip&Dip, ComponentLink1URL=https://www.chipdip.ru/product/74hc21d.653, ComponentLink2Description=DataSheet, ComponentLink2URL=https://static.chipdip.ru/lib/522/DOC011522559.pdf, Type=IC
U45 U50: library part 2(4NOR), "2 logic elements \"4NOR\"", Manufacturer=Nexperia, Part Number=74HC4002D,652, ComponentLink1Description=Chip&Dip, ComponentLink1URL=https://www.chipdip.ru/product/74hc4002d, ComponentLink2Description=DataSheet, ComponentLink2URL=https://static.chipdip.ru/lib/493/DOC011493188.pdf, Type=IC

## Free pads (board coordinates)
  round 5.8 hole 3.2: A(5,5) A(5,48) A(78,5) A(78,48)

## Via types
v1: diameter 0.8, hole 0.4, Top Layer to Bottom Layer, tented both sides, 228 vias

## Nets (pads, with @x,y where several pads share a name; then routed paths per layer and width w, separated by ;. In a path a pad name is that pad's centre, name@x,y a point inside that pad or via, vN(x,y) a via of type N, cw(c..) or ccw(c..) an arc to the next point about the centre after c; other vN are vias at no path point)
+2V_Detection1: R9.1 R12.2 U9.3 U15.3 U17.3 U21.3 | length 64.7
  Top Layer w0.254: v1(18.475,26.706) 19.747,27.978 19.747,28.337 19.97,28.56 U15.3@19.975,28.56 ; v1(19.925,37.55) 19.925,40.01 U9.3@20,40.085 ; U17.3@41.075,35.96 41.097,35.982 42.173,35.982 42.377,35.778 42.377,32.822 42.354,32.799 42.354,32.504 v1(42.25,32.4) ; U21.3@41.15,47.485 41.167,47.467 42.333,47.467 v1(42.35,47.45) ; v1@42.25,35.825 v1(42.425,36)
  Bottom Layer w0.254: v1(18.475,26.706) 18.475,36.1 20.007,37.632 27.709,37.632 28.025,37.947 ; R12.2@28.025,36.665 28.025,37.825 28.025,37.947 ; R9.1@28.025,39.23 28.025,37.947 ; v1(42.25,32.4) 41.45,31.6 30.725,31.6 29.35,32.975 29.35,37.175 28.578,37.947 28.025,37.947 ; v1(42.35,47.45) 42.387,47.412 42.387,36.037 v1(42.425,36)
+2V_Detection2: R19.1 R22.2 U27.3 U33.3 U35.3 U39.3 | length 66.6
  Top Layer w0.254: v1(20,13.865) 20,16.075 U27.3@20.05,16.125 ; U33.3@20.025,4.6 20.05,4.575 v1(20.05,1.975) ; U35.3@41.125,12 41.147,12.022 42.223,12.022 v1@42.34,11.905 ; U39.3@41.2,23.525 41.217,23.507 42.382,23.507 v1(42.4,23.49) ; v1(42.475,12.04) v1@42.34,11.905 ; v1(42.6,8.25) 42.6,8.398 42.462,8.535 42.462,11.905 v1@42.34,11.905
  Bottom Layer w0.254: v1(20.05,1.975) 18.525,3.5 18.525,12.39 v1(20,13.865) 27.952,13.865 28.075,13.988 ; R22.2@28.075,12.705 28.075,13.865 28.075,13.988 ; R19.1@28.075,15.27 28.075,13.988 ; v1(42.4,23.49) 42.437,23.453 42.437,12.078 v1(42.475,12.04) ; v1(42.6,8.25) 41.99,7.64 30.775,7.64 29.4,9.015 29.4,13.215 28.627,13.988 28.075,13.988
+3V_Detection1: R8.1 R11.2 U7.3 U10.3 U14.3 U19.3 | length 79
  Top Layer w0.254: v1(12.25,40.075) 12.255,40.08 13.905,40.08 U7.3@13.91,40.085 ; v1(12.375,28.575) 12.38,28.58 13.92,28.58 U10.3@13.925,28.585 ; U14.3@47.225,35.86 47.258,35.827 49.018,35.827 v1(49.052,35.793) ; U19.3@47.25,47.285 47.305,47.23 48.525,47.23 v1(48.58,47.175)
  Bottom Layer w0.254: v1(12.25,40.075) 12.25,38.506 12.25,38.388 ; v1(12.375,28.575) 12.95,29.15 12.95,36 12.25,36.7 12.25,38.388 ; R11.2@30.5,36.665 30.5,37.947 ; R8.1@30.5,39.23 30.5,37.947 ; v1(48.58,47.175) 49.827,45.928 49.827,36.568 v1(49.052,35.793) 49.052,32.299 48.653,31.9 44.039,31.9 40.839,35.1 35.597,35.1 35.04,35.657 32.952,35.657 31.85,36.759 31.85,37.425 31.328,37.947 30.5,37.947 ; 12.25,38.388 22.762,38.388 24.45,40.075 29.025,40.075 29.325,39.775 29.325,38.35 29.728,37.947 30.5,37.947
+3V_Detection2: R18.1 R21.2 U25.3 U28.3 U32.3 U37.3 | length 78
  Top Layer w0.254: v1(12.3,16.115) 12.305,16.12 13.955,16.12 U25.3@13.96,16.125 ; v1(12.425,4.615) 12.43,4.62 13.97,4.62 U28.3@13.975,4.625 ; U32.3@47.275,11.9 47.308,11.867 49.068,11.867 v1(49.102,11.833) ; U37.3@47.3,23.325 47.355,23.27 48.575,23.27 v1(48.63,23.215)
  Bottom Layer w0.254: v1(12.3,16.115) 12.3,14.5 ; v1(12.425,4.615) 13,5.19 13,12.04 12.3,12.74 12.3,14.5 ; R21.2@30.55,12.705 30.55,13.988 ; R18.1@30.55,15.27 30.55,13.988 ; v1(48.63,23.215) 49.877,21.968 49.877,12.608 v1(49.102,11.833) 49.102,8.77 48.682,8.35 43.679,8.35 41.204,10.825 37.689,10.825 36.639,11.875 32.45,11.875 31.9,12.425 31.9,13.465 31.377,13.988 30.55,13.988 ; 12.3,14.5 19.713,14.5 19.73,14.517 20.27,14.517 20.287,14.5 26.199,14.5 27.521,15.822 28.629,15.822 29.375,15.076 29.375,14.39 29.777,13.988 30.55,13.988
+4V_Detection1: R7.1 R10.2 U6.3 U8.3 U11.3 U18.3 | length 76
  Top Layer w0.254: v1(12.05,33.875) 12.067,33.892 13.833,33.892 U8.3@13.85,33.91 ; U6.3@13.91,45.31 13.925,45.295 v1(13.925,43.2) ; v1(47.025,44.25) 47.025,42.185 U18.3@47.175,42.035 ; v1(47.075,32.825) 47.075,30.785 U11.3@47.225,30.635
  Bottom Layer w0.254: v1(12.05,33.875) 11.425,34.5 11.425,41.5 13.125,43.2 v1(13.925,43.2) 15.338,43.2 15.84,43.702 16.38,43.702 16.382,43.7 18.32,43.7 19.322,44.702 28.898,44.702 31.575,42.025 31.575,38.525 32.153,37.947 33.05,37.947 ; R10.2@33.05,36.665 33.05,37.947 ; R7.1@33.05,39.23 33.05,37.947 ; v1(47.025,44.25) 48.175,43.1 48.175,33.925 v1(47.075,32.825) 46.975,32.825 46.473,32.323 44.302,32.323 41.125,35.5 37.244,35.5 36.35,36.394 36.35,37.1 35.503,37.947 33.05,37.947
+4V_Detection2: R17.1 R20.2 U24.3 U26.3 U29.3 U36.3 | length 75.2
  Top Layer w0.254: v1(12.1,9.915) 12.117,9.932 13.883,9.932 U26.3@13.9,9.95 ; U24.3@13.96,21.35 14,21.31 v1(14,19.575) ; v1(47.05,20.4) 47.05,18.25 U36.3@47.225,18.075 ; v1(47.25,9.025) 47.25,6.7 U29.3@47.275,6.675
  Bottom Layer w0.254: v1(12.1,9.915) 11.475,10.54 11.475,17.54 13.457,19.522 13.947,19.522 v1(14,19.575) 16.178,19.575 16.205,19.602 16.745,19.602 16.772,19.575 17.975,19.575 19.142,20.742 28.433,20.742 31.5,17.675 31.5,14.69 32.202,13.988 33.1,13.988 ; R20.2@33.1,12.705 33.1,13.988 ; R17.1@33.1,15.27 33.1,13.988 ; v1(47.05,20.4) 48.225,19.225 48.225,11.204 ; v1(47.25,9.025) 47.354,9.129 47.981,9.129 48.225,9.373 48.225,11.204 ; 33.1,13.988 35.062,13.988 37.846,11.204 48.225,11.204
+24V_in: C1.2 J5.1 U3.1 | length 12.9
  Top Layer w0.5: U3.1@68.45,33.035 68.45,32.629 69.175,31.904 C1.2@69.175,27.55 71.505,27.55 J5.1@74.88,24.175
GND: C2.1 C3.1 C4.1 C5.1 C6.1 C7.1 C8.1 C9.1 C10.1 C11.2 C12.1 C13.1 C14.1 C15.1 C16.1 C17.1 C18.1 C19.1 C20.1 C21.1 C22.1 C23.1 C24.1 C25.1 C26.1 C27.1 C28.1 C29.2 C30.1 C31.1 C32.1 C33.1 C34.1 C35.1 C36.1 C37.1 C38.1 C39.1 C40.1 C41.1 C42.1 C43.1 C44.1 C45.1 C46.1 C47.1 R1.1 R2.1 R5.1 R6.1 R10.1 R11.1 R12.1 R13.1 R14.1 R15.1 R16.1 R20.1 R21.1 R22.1 R23.1 R24.1 R25.1 R26.1 R28.1 R29.1 R30.1 R31.1 R33.1 R34.1 R35.1 R36.1 U3.4 U6.2 U7.2 U8.2 U9.2 U10.2 U11.2 U12.2 U13.7 U14.2 U15.2 U16.2 U17.2 U18.2 U19.2 U20.2 U21.2 U22.7 U23.2 U24.2 U25.2 U26.2 U27.2 U28.2 U29.2 U30.2 U31.7 U32.2 U33.2 U34.2 U35.2 U36.2 U37.2 U38.2 U39.2 U40.7 U41.2 U42.7 U43.7 U44.7 U45.7 U46.2 U47.7 U48.7 U49.7 U50.7 U51.2 | length 4.3
  GND w0.5: 66.35,40.675 70.65,40.675 70.675,40.65
  other v1: 50.475,3.05 30.85,6.75 60.15,7.15 64.45,7.65 14.675,7.975 40.65,8.525 31.05,8.6 36.25,8.7 60.375,9.75 69.2,9.925 43.275,10.475 47.175,14.075 41.602,14.376 64.15,14.925 13.075,15.225 12.75,17.35 17.325,18.075 24.35,18.225 10.375,18.35 30.05,20.7 30.75,30.75 30.95,32.55 40.55,32.55 36.225,32.725 78.2,33.35 26.35,35.525 43.525,36.725 35.025,37.025 38.075,38.075 25.75,38.925 13.125,39.2 25.75,41.025 12.5,41.275 19,42.775 10.5,43.2 41.375,44.325 30.075,44.825 24.825,50.075 47.8,50.875 71.75,51.2
GND_in: C1.1 J5.4 U3.2 | length 25.5
  Top Layer w0.5: U3.2@68.45,35.575 66.825,33.95 66.825,25.613 68.318,24.12 69.105,24.12 C1.1@69.175,24.05 70.175,24.05 72.35,21.875 72.35,17.705 J5.4@74.88,15.175
Green1: U1.1 U43.3 | length 34.6
  Top Layer w0.254: v1(74.55,37.875) 79.275,37.875 79.92,38.52 U1.1@79.92,39.5
  Bottom Layer w0.254: U43.3@52.85,31.435 54.09,31.435 56,29.525 59.789,29.525 60.764,30.5 63.65,30.5 65.6,32.45 65.6,35.9 67.575,37.875 v1(74.55,37.875)
Green2: U4.1 U48.3 | length 51.5
  Bottom Layer w0.254: U48.3@52.765,7.33 54.045,7.33 56.015,5.36 59.935,5.36 60.85,6.275 64.425,6.275 66.175,8.025 66.175,24.375 77.38,35.58 U4.1@77.38,39.525
Green_On1_Primary: U13.6 U42.2 U44.1 | length 41.3
  Top Layer w0.254: U13.6@27.75,41.14 29.765,41.14 31.7,43.075 35.55,43.075 v1(35.6,43.125) ; v1(52.825,37.825) 52.837,37.812 52.837,36.507 U44.1@52.85,36.495 ; U42.2@52.85,46.655 52.867,46.638 54.358,46.638 v1(54.375,46.621)
  Signal w0.254: v1(35.6,43.125) 35.67,43.125 36.022,43.477 44.448,43.477 46.725,41.2 49.65,41.2 50.728,40.122 50.728,39.108 52.011,37.825 v1(52.825,37.825) ; v1@52.825,37.85 52.825,45.071 v1(54.375,46.621)
Green_On1_Secondary: U31.6 U47.2 U49.1 | length 41.5
  Top Layer w0.254: U31.6@27.8,17.18 29.815,17.18 31.75,19.115 35.6,19.115 v1(35.65,19.165) ; v1(52.74,13.72) 52.753,13.708 52.753,12.403 U49.1@52.765,12.39 ; U47.2@52.765,22.55 52.782,22.533 54.483,22.533 v1(54.5,22.516)
  Signal w0.254: v1(35.65,19.165) 35.72,19.165 36.072,19.517 44.498,19.517 47.198,16.817 49.858,16.817 50.775,15.9 50.775,15 52.055,13.72 v1@52.636,13.72 ; v1@52.636,13.824 v1(52.74,13.72) 52.74,13.824 52.74,14.129 52.74,20.756 v1(54.5,22.516)
Green_On2_Primary: U22.11 U42.5 U44.2 | length 37
  Top Layer w0.254: U22.11@27.7,32.285 29.21,32.285 v1(30.625,33.7) ; v1(50.7,35.15) 50.737,35.187 52.812,35.187 U44.2@52.85,35.225 53.925,35.225 54.825,36.125 54.825,42.125 54.15,42.8 52.895,42.8 U42.5@52.85,42.845
  GND w0.254: v1(30.625,33.7) 49.25,33.7 v1(50.7,35.15)
Green_On2_Secondary: U40.11 U47.5 U49.2 | length 38.4
  Top Layer w0.254: U40.11@27.75,8.325 29.26,8.325 v1(30.675,9.74) ; v1(50.604,11.121) U49.2@52.764,11.121 ; U49.2@52.765,11.12 54.57,11.12 55.65,12.2 55.65,17.775 54.73,18.695 52.81,18.695 U47.5@52.765,18.74
  GND w0.254: v1(30.675,9.74) 49.222,9.74 v1(50.604,11.121)
Green_On3_Primary: U22.6 U42.10 U44.4 | length 38.4
  Top Layer w0.254: U22.6@33.45,34.825 34.9,34.825 v1(34.925,34.85) ; U44.4@52.85,32.685 52.855,32.68 54.52,32.68 v1(54.525,32.675) 56.15,34.3 56.15,41.825 57.17,42.845 U42.10@58.6,42.845
  GND w0.254: v1(34.925,34.85) 49.4,34.85 50.85,36.3 52.325,36.3 54.575,34.05 54.575,32.725 v1(54.525,32.675)
Green_On3_Secondary: U40.6 U47.10 U49.4 | length 37.9
  Top Layer w0.254: U40.6@33.5,10.865 34.95,10.865 v1(34.975,10.89) ; U49.4@52.765,8.58 52.77,8.575 54.435,8.575 v1(54.44,8.57) 56.065,10.195 56.065,17.72 57.085,18.74 U47.10@58.515,18.74
  GND w0.254: v1(34.975,10.89) 35.112,10.89 35.397,11.175 49.735,11.175 50.36,11.8 52.635,11.8 54.49,9.945 54.49,8.62 v1(54.44,8.57)
Green_On_VD_Primary: U13.11 U42.13 U44.5 | length 47.8
  Top Layer w0.254: U13.11@33.5,43.68 34.755,43.68 35.996,44.921 35.996,47.021 37.675,48.7 49.578,48.7 51.005,47.273 v1(55.927,47.273) 56.545,46.655 U42.13@58.6,46.655 ; U44.5@52.85,31.415 52.87,31.395 55.18,31.395 v1(55.2,31.375)
  Signal w0.254: v1(55.2,31.375) 55.675,31.85 55.675,46.873 55.927,47.125 v1(55.927,47.273)
Green_On_VD_Secondary: U31.11 U47.13 U49.5 | length 48
  Top Layer w0.254: U31.11@33.55,19.72 34.805,19.72 36.046,20.961 36.046,23.471 37.315,24.74 49.628,24.74 51.2,23.168 v1(55.842,23.168) 56.46,22.55 U47.13@58.515,22.55 ; U49.5@52.765,7.31 52.785,7.29 55.095,7.29 v1(55.115,7.27)
  Signal w0.254: v1(55.115,7.27) 55.842,7.997 v1(55.842,23.168)
In1: J1.2 R13.2 R23.2 U6.1 U7.1 U9.1 U24.1 U25.1 U27.1 | length 66.3
  Top Layer w0.254: J1.2@8.07,40.025 8.07,45.595 9.685,47.21 12.625,47.21 ; R23.2@11.35,23.25 12.675,23.25 ; v1(12.675,24.575) 12.675,23.25 ; U6.1@13.91,47.21 12.625,47.21 ; U24.1@13.96,23.25 12.675,23.25 ; U9.1@20,41.985 19.958,41.943 19.268,41.943 18.775,41.45 18.775,40.85 17.175,39.25 15.375,39.25 15.025,39.6 15.025,41.622 14.642,42.004 13.891,42.004 13.845,42.05 12.9,42.05 12.625,42.325 12.625,47.21 ; U27.1@20.05,18.025 20.008,17.983 19.318,17.983 18.825,17.49 18.825,16.89 17.225,15.29 15.425,15.29 15.075,15.64 15.075,17.662 14.692,18.044 13.941,18.044 13.895,18.09 12.95,18.09 12.675,18.365 12.675,23.25
  GND w0.254: J1.2@8.07,40.025 13.325,34.77 13.325,25.225 v1(12.675,24.575)